# Altium PCB heart.PcbDoc (part 3 of 8)
Units mil, origin at the board's own origin, x right, y up, seen from the top; angles counter-clockwise.
Board outline 5000 x 6000 mil, 2 copper layers (Top Layer, Bottom Layer); 76 components, 43 nets, 328 pads, 50 vias.
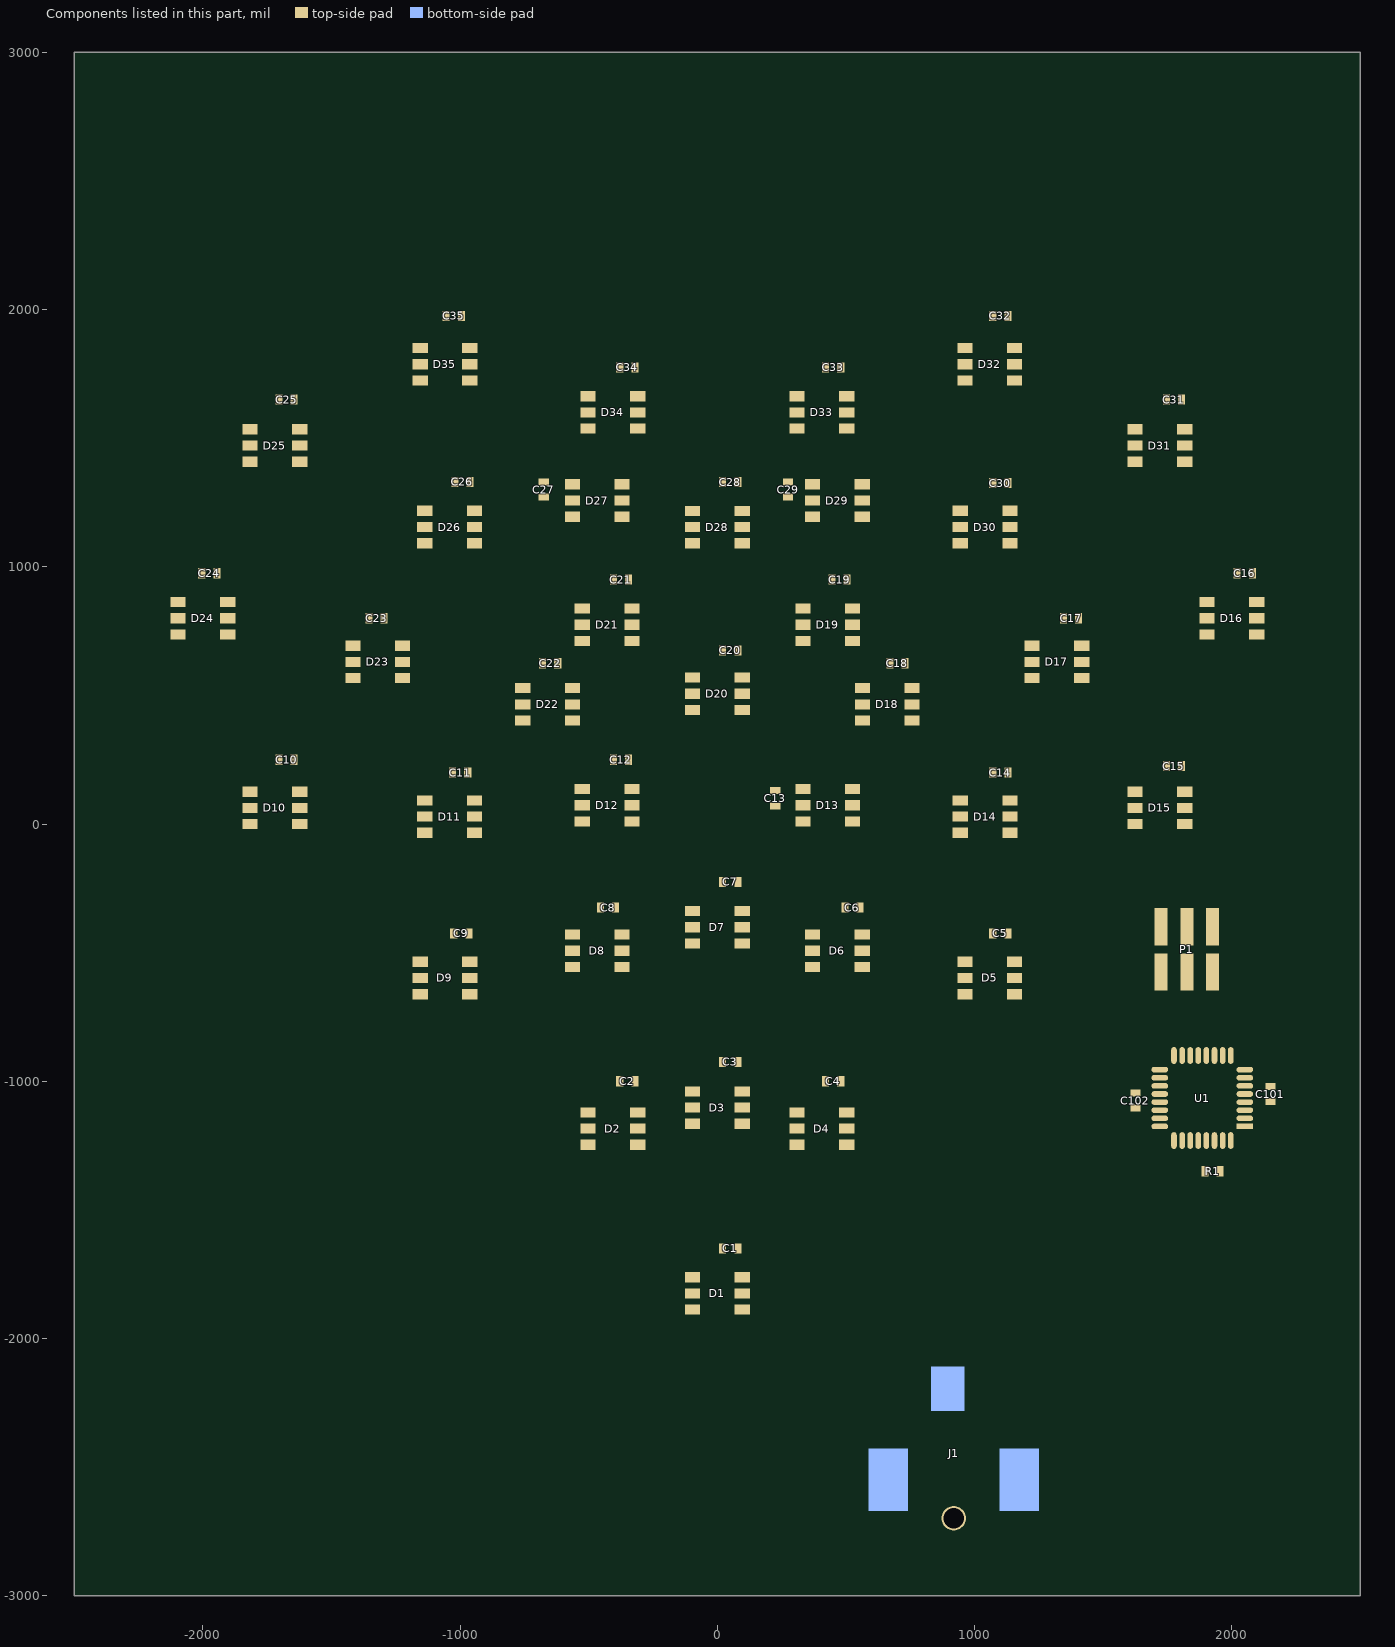
[diagram p3: the components of this part, seen from the top]

## Via types
v1: diameter 48, hole 20, Top Layer to Bottom Layer, 46 vias
v2: diameter 165, hole 150, Top Layer to Bottom Layer, 4 vias

## Nets (pads, with @x,y where several pads share a name; then routed paths per layer and width w, separated by ;. In a path a pad name is that pad's centre, name@x,y a point inside that pad or via, vN(x,y) a via of type N, cw(c..) or ccw(c..) an arc to the next point about the centre after c; other vN are vias at no path point) (continued)
copper on no net: (continued)
  Bottom Layer w2.65: -2192.83,-1878.82 -2171.59,-1878.82 ; -2192.83,-1876.16 -2176.9,-1876.16 ; -2192.83,-1873.51 -2184.86,-1873.51 ; -2192.83,-1838.99 -2076,-1838.99 ; -2192.83,-1836.34 -2073.35,-1836.34 ; -2192.83,-1833.68 -2070.69,-1833.68 ; -2192.83,-1831.03 -2068.04,-1831.03 ; -2192.83,-1796.51 -2184.86,-1796.51 ; -2192.83,-1793.86 -2176.9,-1793.86 ; -2192.83,-1791.2 -2171.59,-1791.2 ; -2192.83,-1788.55 -2168.93,-1788.55 ; -2192.83,-1785.89 -2166.28,-1785.89 ; -2192.83,-1783.24 -2163.62,-1783.24 ; -2192.83,-1780.58 -2160.97,-1780.58 ; -2192.83,-1777.93 -2158.31,-1777.93 ; -2192.83,-1775.27 -2158.31,-1775.27 ; -2192.83,-1772.62 -2155.66,-1772.62 ; -2192.83,-1769.96 -2155.66,-1769.96 ; -2192.83,-1767.31 -2153,-1767.31 ; -2192.83,-1764.65 -2153,-1764.65 ; -2192.83,-1762 -2153,-1762 ; -2192.83,-1759.34 -2153,-1759.34 ; -2192.83,-1756.69 -2153,-1756.69 ; -2192.83,-1754.03 -2153,-1754.03 ; -2192.83,-1751.38 -2153,-1751.38 ; -2192.83,-1748.72 -2153,-1748.72 ; -2192.83,-1746.07 -2153,-1746.07 ; -2192.83,-1743.41 -2153,-1743.41 ; -2192.83,-1740.76 -2153,-1740.76 ; -2192.83,-1738.1 -2155.66,-1738.1 ; -2192.83,-1735.45 -2155.66,-1735.45 ; -2192.83,-1732.79 -2155.66,-1732.79 ; -2192.83,-1730.14 -2158.31,-1730.14 ; -2192.83,-1727.48 -2158.31,-1727.48 ; -2192.83,-1724.83 -2160.97,-1724.83 ; -2192.83,-1722.17 -2160.97,-1722.17 ; -2192.83,-1719.52 -2163.62,-1719.52 ; -2192.83,-1716.86 -2166.28,-1716.86 ; -2192.83,-1714.21 -2168.93,-1714.21 ; -2192.83,-1711.55 -2168.93,-1711.55 ; -2192.83,-1708.9 -2171.59,-1708.9 ; -2192.83,-1706.24 -2171.59,-1706.24 ; -2192.83,-1703.59 -2174.24,-1703.59 ; -2192.83,-1700.93 -2171.59,-1700.93 ; -2192.83,-1698.28 -2044.14,-1698.28 ; -2192.83,-1695.62 -2046.8,-1695.62 ; -2192.83,-1692.97 -2049.45,-1692.97 ; -2192.83,-1690.31 -2049.45,-1690.31 ; -2192.83,-1687.66 -2049.45,-1687.66 ; -2192.83,-1685 -2052.11,-1685 ; -2192.83,-1682.35 -2052.11,-1682.35 ; -2192.83,-1679.69 -2054.76,-1679.69 ; -2192.83,-1677.04 -2054.76,-1677.04 ; -2192.83,-1674.38 -2054.76,-1674.38 ; -2192.83,-1671.73 -2057.42,-1671.73 ; -2192.83,-1669.07 -2057.42,-1669.07 ; -2192.83,-1666.42 -2057.42,-1666.42 ; -2192.83,-1663.76 -2060.07,-1663.76 ; -2192.83,-1661.11 -2060.07,-1661.11 ; -2192.83,-1658.45 -2060.07,-1658.45 ; -2192.83,-1655.8 -2060.07,-1655.8 ; -2192.83,-1653.14 -2060.07,-1653.14 ; -2192.83,-1650.49 -2062.73,-1650.49 ; -2192.83,-1647.83 -2062.73,-1647.83 ; -2192.83,-1645.18 -2062.73,-1645.18 ; -2192.83,-1642.52 -2062.73,-1642.52 ; -2192.83,-1639.86 -2062.73,-1639.86 ; -2192.83,-1637.21 -2062.73,-1637.21 ; -2192.83,-1634.55 -2062.73,-1634.55 ; -2192.83,-1631.9 -2062.73,-1631.9 ; -2192.83,-1629.24 -2062.73,-1629.24 ; -2192.83,-1626.59 -2062.73,-1626.59 ; -2192.83,-1623.93 -2062.73,-1623.93 ; -2192.83,-1621.28 -2062.73,-1621.28 ; -2192.83,-1618.62 -2062.73,-1618.62 ; -2192.83,-1615.97 -2062.73,-1615.97 ; -2192.83,-1613.31 -2060.07,-1613.31 ; -2192.83,-1610.66 -2060.07,-1610.66 ; -2192.83,-1608 -2060.07,-1608 ; -2192.83,-1605.35 -2060.07,-1605.35 ; -2192.83,-1602.69 -2060.07,-1602.69 ; -2192.83,-1600.04 -2057.42,-1600.04 ; -2192.83,-1597.38 -2057.42,-1597.38 ; -2192.83,-1594.73 -2057.42,-1594.73 ; -2192.83,-1592.07 -2107.87,-1592.07 ; -2192.83,-1589.42 -2113.18,-1589.42 ; -2192.83,-1586.76 -2115.83,-1586.76 ; -2192.83,-1584.11 -2118.49,-1584.11 ; -2192.83,-1581.45 -2121.14,-1581.45 ; -2192.83,-1578.8 -2121.14,-1578.8 ; -2192.83,-1576.14 -2121.14,-1576.14 ; -2192.83,-1573.49 -2121.14,-1573.49 ; -2192.83,-1570.83 -2121.14,-1570.83 ; -2192.83,-1568.18 -2118.49,-1568.18 ; -2192.83,-1565.52 -2118.49,-1565.52 ; -2192.83,-1562.87 -2115.83,-1562.87 ; -2192.83,-1560.21 -2110.52,-1560.21 ; -2192.83,-1557.56 -2083.97,-1557.56 ; -2192.83,-1554.9 -2086.62,-1554.9 ; -2192.83,-1552.25 -2086.62,-1552.25 ; -2192.83,-1549.59 -2089.28,-1549.59 ; -2192.83,-1546.94 -2094.59,-1546.94 ; -2192.83,-1544.28 -2097.24,-1544.28 ; -2192.83,-1515.08 -2134.42,-1515.08 ; -2192.83,-1512.42 -2137.07,-1512.42 ; -2192.83,-1509.77 -2137.07,-1509.77 ; -2192.83,-1507.11 -2137.07,-1507.11 ; -2192.83,-1504.46 -2137.07,-1504.46 ; -2192.83,-1501.8 -2137.07,-1501.8 ; -2192.83,-1499.15 -2137.07,-1499.15 ; -2192.83,-1496.49 -2137.07,-1496.49 ; -2192.83,-1493.84 -2137.07,-1493.84 ; -2192.83,-1491.18 -2137.07,-1491.18 ; -2192.83,-1454.01 -2184.86,-1454.01 ; -2192.83,-1451.36 -2179.55,-1451.36 ; -2192.83,-1448.7 -2168.93,-1448.7 ; -2192.83,-1446.05 -2046.8,-1446.05 ; -2192.83,-1443.39 -2046.8,-1443.39 ; -2192.83,-1440.74 -2044.14,-1440.74 ; -2192.83,-1438.08 -2044.14,-1438.08 ; -2192.83,-1435.43 -2041.49,-1435.43 ; -2192.83,-1432.77 -2038.83,-1432.77 ; -2192.83,-1430.12 -2089.28,-1430.12 ; -2192.83,-1427.46 -2099.9,-1427.46 ; -2192.83,-1424.81 -2105.21,-1424.81 ; -2192.83,-1422.15 -2110.52,-1422.15 ; -2192.83,-1419.5 -2113.18,-1419.5 ; -2192.83,-1416.84 -2115.83,-1416.84 ; -2192.83,-1414.19 -2121.14,-1414.19 ; -2192.83,-1411.53 -2121.14,-1411.53 ; -2192.83,-1408.88 -2123.8,-1408.88 ; -2192.83,-1406.22 -2126.45,-1406.22 ; -2192.83,-1403.57 -2126.45,-1403.57 ; -2192.83,-1400.91 -2129.11,-1400.91 ; -2192.83,-1398.26 -2129.11,-1398.26 ; -2192.83,-1395.6 -2129.11,-1395.6 ; -2192.83,-1392.95 -2131.76,-1392.95 ; -2192.83,-1390.29 -2131.76,-1390.29 ; -2192.83,-1387.64 -2131.76,-1387.64 ; -2192.83,-1223.03 -2017.59,-1223.03 ; -2190.17,-1517.73 -2134.42,-1517.73 ; -2190.17,-1488.53 -2137.07,-1488.53 ; -2190.17,-1485.87 -2134.42,-1485.87 ; -2190.17,-1334.54 -2160.97,-1334.54 ; -2190.17,-1225.68 -2009.63,-1225.68 ; -2187.52,-1541.63 -2102.56,-1541.63 ; -2187.52,-1523.04 -2131.76,-1523.04 ; -2187.52,-1520.39 -2131.76,-1520.39 ; -2187.52,-1483.22 -2134.42,-1483.22 ; -2187.52,-1228.34 -2006.97,-1228.34 ; -2184.86,-1533.66 -2118.49,-1533.66 ; -2184.86,-1531.01 -2123.8,-1531.01 ; -2184.86,-1528.35 -2126.45,-1528.35 ; -2184.86,-1525.7 -2129.11,-1525.7 ; -2184.86,-1480.56 -2131.76,-1480.56 ; -2184.86,-1350.47 -2168.93,-1350.47 ; -2184.86,-1331.88 -2155.66,-1331.88 ; -2184.86,-1230.99 -2006.97,-1230.99 ; -2182.21,-1841.65 -2078.66,-1841.65 ; -2182.21,-1828.37 -2065.38,-1828.37 ; -2182.21,-1538.97 -2107.87,-1538.97 ; -2182.21,-1536.32 -2113.18,-1536.32 ; -2182.21,-1353.12 -2168.93,-1353.12 ; -2182.21,-1244.27 -2014.94,-1244.27 ; -2182.21,-1241.61 -2014.94,-1241.61 ; -2182.21,-1238.96 -2012.28,-1238.96 ; -2182.21,-1236.3 -2009.63,-1236.3 ; -2182.21,-1233.65 -2009.63,-1233.65 ; -2179.55,-1865.54 -2153,-1865.54 ; -2179.55,-1804.48 -2153,-1804.48 ; -2179.55,-1477.91 -2131.76,-1477.91 ; -2179.55,-1355.78 -2168.93,-1355.78 ; -2179.55,-1329.23 -2150.35,-1329.23 ; -2176.9,-1358.43 -2168.93,-1358.43 ; -2174.24,-1844.3 -2078.66,-1844.3 ; -2174.24,-1475.25 -2129.11,-1475.25 ; -2174.24,-1366.4 -2171.59,-1366.4 ; -2174.24,-1363.74 -2168.93,-1363.74 ; -2174.24,-1361.09 -2168.93,-1361.09 ; -2174.24,-1326.57 -2145.04,-1326.57 ; -2171.59,-1868.2 -2150.35,-1868.2 ; -2171.59,-1825.72 -2062.73,-1825.72 ; -2171.59,-1801.82 -2150.35,-1801.82 ; -2168.93,-1870.85 -2147.69,-1870.85 ; -2168.93,-1799.17 -2147.69,-1799.17 ; -2168.93,-1472.6 -2126.45,-1472.6 ; -2168.93,-1323.92 -2139.73,-1323.92 ; -2166.28,-1846.96 -2078.66,-1846.96 ; -2163.62,-1873.51 -2145.04,-1873.51 ; -2163.62,-1823.06 -2057.42,-1823.06 ; -2163.62,-1796.51 -2145.04,-1796.51 ; -2163.62,-1321.26 -2134.42,-1321.26 ; -2160.97,-1876.16 -2142.38,-1876.16 ; -2160.97,-1849.61 -2081.31,-1849.61 ; -2160.97,-1820.41 -2052.11,-1820.41 ; -2160.97,-1793.86 -2142.38,-1793.86 ; -2160.97,-1469.94 -2137.07,-1469.94 ; -2158.31,-1969.09 -2076,-1969.09 ; -2158.31,-1958.47 -2155.66,-1958.47 ; -2158.31,-1878.82 -2142.38,-1878.82 ; -2158.31,-1791.2 -2139.73,-1791.2 ; -2158.31,-1700.93 -2044.14,-1700.93 ; -2158.31,-1318.61 -2129.11,-1318.61 ; -2155.66,-1955.81 -2153,-1955.81 ; -2155.66,-1953.16 -2150.35,-1953.16 ; -2155.66,-1881.47 -2139.73,-1881.47 ; -2155.66,-1852.27 -2110.52,-1852.27 ; -2155.66,-1817.75 -2110.52,-1817.75 ; -2155.66,-1788.55 -2139.73,-1788.55 ; -2155.66,-1716.86 -2150.35,-1716.86 ; -2155.66,-1714.21 -2153,-1714.21 ; -2153,-1966.43 -2076,-1966.43 ; -2153,-1950.5 -2147.69,-1950.5 ; -2153,-1886.78 -2115.83,-1886.78 ; -2153,-1884.13 -2115.83,-1884.13 ; -2153,-1785.89 -2115.83,-1785.89 ; -2153,-1783.24 -2118.49,-1783.24 ; -2153,-1722.17 -2145.04,-1722.17 ; -2153,-1719.52 -2147.69,-1719.52 ; -2153,-1703.59 -2041.49,-1703.59 ; -2153,-1315.95 -2123.8,-1315.95 ; -2150.35,-2218.66 -2134.42,-2218.66 ; -2150.35,-2216.01 -2137.07,-2216.01 ; -2150.35,-2213.35 -2137.07,-2213.35 ; -2150.35,-2210.7 -2137.07,-2210.7 ; -2150.35,-2208.04 -2137.07,-2208.04 ; -2150.35,-2205.39 -2137.07,-2205.39 ; -2150.35,-2202.73 -2137.07,-2202.73 ; -2150.35,-2200.08 -2134.42,-2200.08 ; -2150.35,-1947.85 -2145.04,-1947.85 ; -2150.35,-1945.19 -2142.38,-1945.19 ; -2150.35,-1892.09 -2123.8,-1892.09 ; -2150.35,-1889.44 -2121.14,-1889.44 ; -2150.35,-1854.92 -2110.52,-1854.92 ; -2150.35,-1815.1 -2110.52,-1815.1 ; -2150.35,-1780.58 -2121.14,-1780.58 ; -2150.35,-1777.93 -2126.45,-1777.93 ; -2150.35,-1724.83 -2142.38,-1724.83 ; -2147.69,-2226.63 -2134.42,-2226.63 ; -2147.69,-2223.97 -2134.42,-2223.97 ; -2147.69,-2221.32 -2134.42,-2221.32 ; -2147.69,-2197.42 -2134.42,-2197.42 ; -2147.69,-2194.77 -2134.42,-2194.77 ; -2147.69,-2192.11 -2134.42,-2192.11 ; -2147.69,-2189.46 -2131.76,-2189.46 ; -2147.69,-1963.78 -2078.66,-1963.78 ; -2147.69,-1942.54 -2139.73,-1942.54 ; -2147.69,-1939.88 -2139.73,-1939.88 ; -2147.69,-1937.23 -2137.07,-1937.23 ; -2147.69,-1897.4 -2131.76,-1897.4 ; -2147.69,-1894.75 -2131.76,-1894.75 ; -2147.69,-1857.58 -2113.18,-1857.58 ; -2147.69,-1812.44 -2113.18,-1812.44 ; -2147.69,-1775.27 -2131.76,-1775.27 ; -2147.69,-1772.62 -2131.76,-1772.62 ; -2147.69,-1732.79 -2137.07,-1732.79 ; -2147.69,-1730.14 -2139.73,-1730.14 ; -2147.69,-1727.48 -2139.73,-1727.48 ; -2147.69,-1706.24 -2038.83,-1706.24 ; -2147.69,-1313.3 -2118.49,-1313.3 ; -2145.04,-2234.59 -2129.11,-2234.59 ; -2145.04,-2231.94 -2131.76,-2231.94 ; -2145.04,-2229.28 -2131.76,-2229.28 ; -2145.04,-2186.8 -2131.76,-2186.8 ; -2145.04,-2184.15 -2129.11,-2184.15 ; -2145.04,-2181.49 -2129.11,-2181.49 ; -2145.04,-1961.12 -2078.66,-1961.12 ; -2145.04,-1934.57 -2137.07,-1934.57 ; -2145.04,-1931.92 -2134.42,-1931.92 ; -2145.04,-1929.26 -2134.42,-1929.26 ; -2145.04,-1908.02 -2131.76,-1908.02 ; -2145.04,-1905.37 -2131.76,-1905.37 ; -2145.04,-1902.71 -2131.76,-1902.71 ; -2145.04,-1900.06 -2131.76,-1900.06 ; -2145.04,-1860.23 -2113.18,-1860.23 ; -2145.04,-1809.79 -2113.18,-1809.79 ; -2145.04,-1769.96 -2131.76,-1769.96 ; -2145.04,-1767.31 -2131.76,-1767.31 ; -2145.04,-1764.65 -2131.76,-1764.65 ; -2145.04,-1762 -2131.76,-1762 ; -2145.04,-1740.76 -2134.42,-1740.76 ; -2145.04,-1738.1 -2134.42,-1738.1 ; -2145.04,-1735.45 -2137.07,-1735.45 ; -2145.04,-1708.9 -2038.83,-1708.9 ; -2142.38,-2239.9 -2126.45,-2239.9 ; -2142.38,-2237.25 -2126.45,-2237.25 ; -2142.38,-2178.84 -2126.45,-2178.84 ; -2142.38,-2176.18 -2126.45,-2176.18 ; -2142.38,-1958.47 -2078.66,-1958.47 ; -2142.38,-1926.61 -2134.42,-1926.61 ; -2142.38,-1923.95 -2131.76,-1923.95 ; -2142.38,-1921.3 -2131.76,-1921.3 ; -2142.38,-1918.64 -2131.76,-1918.64 ; -2142.38,-1915.99 -2131.76,-1915.99 ; -2142.38,-1913.33 -2131.76,-1913.33 ; -2142.38,-1910.68 -2131.76,-1910.68 ; -2142.38,-1862.89 -2113.18,-1862.89 ; -2142.38,-1807.13 -2113.18,-1807.13 ; -2142.38,-1759.34 -2131.76,-1759.34 ; -2142.38,-1756.69 -2131.76,-1756.69 ; -2142.38,-1754.03 -2131.76,-1754.03 ; -2142.38,-1751.38 -2131.76,-1751.38 ; -2142.38,-1748.72 -2131.76,-1748.72 ; -2142.38,-1746.07 -2131.76,-1746.07 ; -2142.38,-1743.41 -2134.42,-1743.41 ; -2142.38,-1711.55 -2036.18,-1711.55 ; -2142.38,-1310.64 -2110.52,-1310.64 ; -2139.73,-2245.21 -2121.14,-2245.21 ; -2139.73,-2242.56 -2123.8,-2242.56 ; -2139.73,-2173.53 -2123.8,-2173.53 ; -2139.73,-1955.81 -2078.66,-1955.81 ; -2139.73,-1865.54 -2113.18,-1865.54 ; -2139.73,-1804.48 -2115.83,-1804.48 ; -2139.73,-1714.21 -2033.52,-1714.21 ; -2139.73,-1300.02 -2057.42,-1300.02 ; -2139.73,-1297.37 -2121.14,-1297.37 ; -2139.73,-1294.71 -2123.8,-1294.71 ; -2139.73,-1292.06 -2126.45,-1292.06 ; -2139.73,-1289.4 -2129.11,-1289.4 ; -2139.73,-1286.75 -2131.76,-1286.75 ; -2139.73,-1284.09 -2131.76,-1284.09 ; -2139.73,-1281.44 -2134.42,-1281.44 ; -2139.73,-1278.78 -2134.42,-1278.78 ; -2137.07,-2277.07 -2131.76,-2277.07 ; -2137.07,-2274.42 -2129.11,-2274.42 ; -2137.07,-2247.87 -2118.49,-2247.87 ; -2137.07,-2170.87 -2121.14,-2170.87 ; -2137.07,-2168.22 -2118.49,-2168.22 ; -2137.07,-1953.16 -2078.66,-1953.16 ; -2137.07,-1868.2 -2115.83,-1868.2 ; -2137.07,-1801.82 -2115.83,-1801.82 ; -2137.07,-1716.86 -2030.87,-1716.86 ; -2137.07,-1307.99 -2099.9,-1307.99 ; -2137.07,-1305.33 -2046.8,-1305.33 ; -2137.07,-1302.68 -2052.11,-1302.68 ; -2137.07,-1276.13 -2134.42,-1276.13 ; -2137.07,-1273.47 -2134.42,-1273.47 ; -2134.42,-2287.69 -1698.99,-2287.69 ; -2134.42,-2271.76 -2126.45,-2271.76 ; -2134.42,-2269.11 -2123.8,-2269.11 ; -2134.42,-2266.45 -2121.14,-2266.45 ; -2134.42,-2263.8 -2060.07,-2263.8 ; -2134.42,-2261.14 -2089.28,-2261.14 ; -2134.42,-2258.49 -2099.9,-2258.49 ; -2134.42,-2250.52 -2115.83,-2250.52 ; -2134.42,-2165.56 -2115.83,-2165.56 ; -2134.42,-1950.5 -2078.66,-1950.5 ; -2134.42,-1881.47 -2126.45,-1881.47 ; -2134.42,-1788.55 -2126.45,-1788.55 ; -2134.42,-1719.52 -2028.21,-1719.52 ; -2134.42,-1448.7 -2046.8,-1448.7 ; -2131.76,-2253.18 -2110.52,-2253.18 ; -2131.76,-2162.91 -2113.18,-2162.91 ; -2131.76,-1947.85 -2078.66,-1947.85 ; -2131.76,-1945.19 -2076,-1945.19 ; -2131.76,-1870.85 -2115.83,-1870.85 ; -2131.76,-1724.83 -2022.9,-1724.83 ; -2131.76,-1722.17 -2025.56,-1722.17 ; -2129.11,-2255.83 -2105.21,-2255.83 ; -2129.11,-2160.25 -2107.87,-2160.25 ; -2129.11,-1942.54 -2076,-1942.54 ; -2129.11,-1939.88 -2076,-1939.88 ; -2129.11,-1799.17 -2118.49,-1799.17 ; -2129.11,-1730.14 -2014.94,-1730.14 ; -2129.11,-1727.48 -2020.25,-1727.48 ; -2126.45,-2285.04 -1701.65,-2285.04 ; -2126.45,-2157.6 -2102.56,-2157.6 ; -2126.45,-2125.73 -2038.83,-2125.73 ; -2126.45,-1937.23 -2073.35,-1937.23 ; -2126.45,-1934.57 -2073.35,-1934.57 ; -2126.45,-1931.92 -2070.69,-1931.92 ; -2126.45,-1738.1 -2001.66,-1738.1 ; -2126.45,-1735.45 -2006.97,-1735.45 ; -2126.45,-1732.79 -2012.28,-1732.79 ; -2126.45,-1451.36 -2046.8,-1451.36 ; -2123.8,-2282.38 -1706.96,-2282.38 ; -2123.8,-2154.94 -2097.24,-2154.94 ; -2123.8,-2123.08 -2038.83,-2123.08 ; -2123.8,-1929.26 -2068.04,-1929.26 ; -2123.8,-1926.61 -2068.04,-1926.61 ; -2123.8,-1923.95 -2065.38,-1923.95 ; -2123.8,-1921.3 -2062.73,-1921.3 ; -2123.8,-1918.64 -2057.42,-1918.64 ; -2123.8,-1915.99 -2054.76,-1915.99 ; -2123.8,-1908.02 -2041.49,-1908.02 ; -2123.8,-1905.37 -2036.18,-1905.37 ; -2123.8,-1902.71 -2030.87,-1902.71 ; -2123.8,-1767.31 -1972.46,-1767.31 ; -2123.8,-1764.65 -1969.8,-1764.65 ; -2123.8,-1762 -1967.15,-1762 ; -2123.8,-1754.03 -1882.19,-1754.03 ; -2123.8,-1751.38 -1879.53,-1751.38 ; -2123.8,-1748.72 -1871.57,-1748.72 ; -2123.8,-1746.07 -1977.77,-1746.07 ; -2123.8,-1743.41 -1988.39,-1743.41 ; -2123.8,-1740.76 -1996.35,-1740.76 ; -2123.8,-1384.98 -2110.52,-1384.98 ; -2123.8,-1281.44 -2097.24,-1281.44 ; -2123.8,-1278.78 -2091.93,-1278.78 ; -2123.8,-1276.13 -2086.62,-1276.13 ; -2123.8,-1273.47 -2078.66,-1273.47 ; -2121.14,-2279.73 -2099.9,-2279.73 ; -2121.14,-2231.94 -1983.08,-2231.94 ; -2121.14,-2120.42 -2041.49,-2120.42 ; -2121.14,-1913.33 -2052.11,-1913.33 ; -2121.14,-1910.68 -2046.8,-1910.68 ; -2121.14,-1900.06 -2060.07,-1900.06 ; -2121.14,-1769.96 -1975.11,-1769.96 ; -2121.14,-1759.34 -1884.84,-1759.34 ; -2121.14,-1756.69 -1884.84,-1756.69 ; -2121.14,-1395.6 -2107.87,-1395.6 ; -2121.14,-1392.95 -2107.87,-1392.95 ; -2121.14,-1390.29 -2110.52,-1390.29 ; -2121.14,-1387.64 -2110.52,-1387.64 ; -2121.14,-1382.33 -2110.52,-1382.33 ; -2121.14,-1379.67 -2110.52,-1379.67 ; -2121.14,-1377.02 -2110.52,-1377.02 ; -2121.14,-1374.36 -2107.87,-1374.36 ; -2121.14,-1270.82 -2070.69,-1270.82 ; -2118.49,-2277.07 -2110.52,-2277.07 ; -2118.49,-2234.59 -1884.84,-2234.59 ; -2118.49,-2152.28 -2073.35,-2152.28 ; -2118.49,-1881.47 -2113.18,-1881.47 ; -2118.49,-1788.55 -2113.18,-1788.55 ; -2118.49,-1454.01 -2049.45,-1454.01 ; -2118.49,-1400.91 -2102.56,-1400.91 ; -2118.49,-1398.26 -2105.21,-1398.26 ; -2118.49,-1371.71 -2107.87,-1371.71 ; -2118.49,-1369.05 -2105.21,-1369.05 ; -2118.49,-1284.09 -2105.21,-1284.09 ; -2115.83,-2237.25 -1879.53,-2237.25 ; -2115.83,-2149.63 -2025.56,-2149.63 ; -2115.83,-2117.77 -2044.14,-2117.77 ; -2115.83,-1897.4 -2070.69,-1897.4 ; -2115.83,-1772.62 -1975.11,-1772.62 ; -2115.83,-1507.11 -2078.66,-1507.11 ; -2115.83,-1504.46 -2083.97,-1504.46 ; -2115.83,-1501.8 -2086.62,-1501.8 ; -2115.83,-1499.15 -2089.28,-1499.15 ; -2115.83,-1406.22 -2091.93,-1406.22 ; -2115.83,-1403.57 -2099.9,-1403.57 ; -2115.83,-1366.4 -2102.56,-1366.4 ; -2115.83,-1268.16 -2065.38,-1268.16 ; -2113.18,-2266.45 -2065.38,-2266.45 ; -2113.18,-2239.9 -1876.88,-2239.9 ; -2113.18,-2146.97 -2028.21,-2146.97 ; -2113.18,-2115.11 -2046.8,-2115.11 ; -2113.18,-1894.75 -2073.35,-1894.75 ; -2113.18,-1775.27 -1975.11,-1775.27 ; -2113.18,-1512.42 -2070.69,-1512.42 ; -2113.18,-1509.77 -2076,-1509.77 ; -2113.18,-1496.49 -2091.93,-1496.49 ; -2113.18,-1493.84 -2097.24,-1493.84 ; -2113.18,-1456.67 -2049.45,-1456.67 ; -2113.18,-1408.88 -2041.49,-1408.88 ; -2113.18,-1363.74 -2097.24,-1363.74 ; -2113.18,-1297.37 -2062.73,-1297.37 ; -2113.18,-1265.51 -2057.42,-1265.51 ; -2113.18,-1262.85 -2049.45,-1262.85 ; -2113.18,-1260.2 -2044.14,-1260.2 ; -2113.18,-1257.54 -2036.18,-1257.54 ; -2110.52,-2242.56 -1874.22,-2242.56 ; -2110.52,-1892.09 -2078.66,-1892.09 ; -2110.52,-1777.93 -1977.77,-1777.93 ; -2110.52,-1515.08 -2065.38,-1515.08 ; -2110.52,-1491.18 -2099.9,-1491.18 ; -2110.52,-1361.09 -2076,-1361.09 ; -2107.87,-2245.21 -2052.11,-2245.21 ; -2107.87,-2112.46 -2049.45,-2112.46 ; -2107.87,-1889.44 -2078.66,-1889.44 ; -2107.87,-1857.58 -2083.97,-1857.58 ; -2107.87,-1854.92 -2083.97,-1854.92 ; -2107.87,-1852.27 -2081.31,-1852.27 ; -2107.87,-1817.75 -2044.14,-1817.75 ; -2107.87,-1815.1 -1956.53,-1815.1 ; -2107.87,-1812.44 -1959.18,-1812.44 ; -2107.87,-1780.58 -1977.77,-1780.58 ; -2107.87,-1517.73 -2057.42,-1517.73 ; -2107.87,-1459.32 -2049.45,-1459.32 ; -2107.87,-1411.53 -2046.8,-1411.53 ; -2105.21,-2269.11 -2073.35,-2269.11 ; -2105.21,-2144.32 -2028.21,-2144.32 ; -2105.21,-2109.8 -2054.76,-2109.8 ; -2105.21,-1886.78 -2081.31,-1886.78 ; -2105.21,-1884.13 -2083.97,-1884.13 ; -2105.21,-1865.54 -2083.97,-1865.54 ; -2105.21,-1862.89 -2083.97,-1862.89 ; -2105.21,-1860.23 -2083.97,-1860.23 ; -2105.21,-1809.79 -1961.84,-1809.79 ; -2105.21,-1807.13 -1964.49,-1807.13 ; -2105.21,-1804.48 -1964.49,-1804.48 ; -2105.21,-1785.89 -1975.11,-1785.89 ; -2105.21,-1783.24 -1975.11,-1783.24 ; -2105.21,-1520.39 -2038.83,-1520.39 ; -2105.21,-1461.98 -2049.45,-1461.98 ; -2105.21,-1414.19 -2052.11,-1414.19 ; -2105.21,-1358.43 -2081.31,-1358.43 ; -2102.56,-2247.87 -2057.42,-2247.87 ; -2102.56,-1881.47 -2083.97,-1881.47 ; -2102.56,-1878.82 -2083.97,-1878.82 ; -2102.56,-1876.16 -2083.97,-1876.16 ; -2102.56,-1873.51 -2086.62,-1873.51 ; -2102.56,-1870.85 -2086.62,-1870.85 ; -2102.56,-1868.2 -2083.97,-1868.2 ; -2102.56,-1801.82 -1967.15,-1801.82 ; -2102.56,-1799.17 -1969.8,-1799.17 ; -2102.56,-1796.51 -1969.8,-1796.51 ; -2102.56,-1793.86 -1972.46,-1793.86 ; -2102.56,-1791.2 -1972.46,-1791.2 ; -2102.56,-1788.55 -1975.11,-1788.55 ; -2102.56,-1464.63 -2046.8,-1464.63 ; -2102.56,-1416.84 -2057.42,-1416.84 ; -2102.56,-1294.71 -2068.04,-1294.71 ; -2099.9,-2141.66 -2028.21,-2141.66 ; -2099.9,-2107.15 -2057.42,-2107.15 ; -2099.9,-1523.04 -2009.63,-1523.04 ; -2099.9,-1390.29 -2054.76,-1390.29 ; -2099.9,-1387.64 -2052.11,-1387.64 ; -2097.24,-2104.49 -1988.39,-2104.49 ; -2097.24,-1592.07 -2057.42,-1592.07 ; -2097.24,-1560.21 -2083.97,-1560.21 ; -2097.24,-1525.7 -2012.28,-1525.7 ; -2097.24,-1467.29 -2046.8,-1467.29 ; -2097.24,-1392.95 -2057.42,-1392.95 ; -2097.24,-1355.78 -2089.28,-1355.78 ; -2097.24,-1292.06 -2065.38,-1292.06 ; -2094.59,-2250.52 -2065.38,-2250.52 ; -2094.59,-1562.87 -2083.97,-1562.87 ; -2094.59,-1469.94 -2046.8,-1469.94 ; -2094.59,-1419.5 -2065.38,-1419.5 ; -2094.59,-1395.6 -2062.73,-1395.6 ; -2091.93,-2101.84 -1988.39,-2101.84 ; -2091.93,-1565.52 -2083.97,-1565.52 ; -2091.93,-1528.35 -2014.94,-1528.35 ; -2091.93,-1472.6 -2046.8,-1472.6 ; -2091.93,-1289.4 -2057.42,-1289.4 ; -2089.28,-2154.94 -2073.35,-2154.94 ; -2089.28,-2139.01 -2057.42,-2139.01 ; -2089.28,-1589.42 -2054.76,-1589.42 ; -2089.28,-1570.83 -2083.97,-1570.83 ; -2089.28,-1568.18 -2083.97,-1568.18 ; -2089.28,-1475.25 -2044.14,-1475.25 ; -2086.62,-2160.25 -2073.35,-2160.25 ; -2086.62,-2157.6 -2073.35,-2157.6 ; -2086.62,-2099.18 -1988.39,-2099.18 ; -2086.62,-1531.01 -2020.25,-1531.01 ; -2086.62,-1477.91 -2041.49,-1477.91 ; -2086.62,-1398.26 -2070.69,-1398.26 ; -2086.62,-1286.75 -2049.45,-1286.75 ; -2083.97,-2165.56 -2073.35,-2165.56 ; -2083.97,-2162.91 -2073.35,-2162.91 ; -2083.97,-1586.76 -2054.76,-1586.76 ; -2083.97,-1533.66 -2020.25,-1533.66 ; -2083.97,-1480.56 -2041.49,-1480.56 ; -2081.31,-2178.84 -2078.66,-2178.84 ; -2081.31,-2176.18 -2076,-2176.18 ; -2081.31,-2173.53 -2076,-2173.53 ; -2081.31,-2170.87 -2073.35,-2170.87 ; -2081.31,-2168.22 -2073.35,-2168.22 ; -2081.31,-2096.53 -1988.39,-2096.53 ; -2081.31,-1584.11 -2054.76,-1584.11 ; -2081.31,-1536.32 -2022.9,-1536.32 ; -2081.31,-1483.22 -2038.83,-1483.22 ; -2081.31,-1284.09 -2044.14,-1284.09 ; -2078.66,-2279.73 -1712.27,-2279.73 ; -2078.66,-1581.45 -2052.11,-1581.45 ; -2078.66,-1538.97 -2025.56,-1538.97 ; -2078.66,-1485.87 -2036.18,-1485.87 ; -2076,-2093.87 -1985.73,-2093.87 ; -2076,-1578.8 -2052.11,-1578.8 ; -2076,-1541.63 -2028.21,-1541.63 ; -2076,-1488.53 -2033.52,-1488.53 ; -2073.35,-1576.14 -2049.45,-1576.14 ; -2073.35,-1573.49 -2049.45,-1573.49 ; -2073.35,-1549.59 -2036.18,-1549.59 ; -2073.35,-1546.94 -2033.52,-1546.94 ; -2073.35,-1544.28 -2030.87,-1544.28 ; -2073.35,-1491.18 -2028.21,-1491.18 ; -2073.35,-1307.99 -2044.14,-1307.99 ; -2073.35,-1281.44 -2036.18,-1281.44 ; -2070.69,-2261.14 -2057.42,-2261.14 ; -2070.69,-1570.83 -2046.8,-1570.83 ; -2070.69,-1568.18 -2046.8,-1568.18 ; -2070.69,-1565.52 -2044.14,-1565.52 ; -2070.69,-1562.87 -2044.14,-1562.87 ; -2070.69,-1560.21 -2041.49,-1560.21 ; -2070.69,-1557.56 -2041.49,-1557.56 ; -2070.69,-1554.9 -2038.83,-1554.9 ; -2070.69,-1552.25 -2036.18,-1552.25 ; -2070.69,-1493.84 -2025.56,-1493.84 ; -2070.69,-1430.12 -2036.18,-1430.12 ; -2068.04,-2277.07 -1874.22,-2277.07 ; -2068.04,-2091.22 -1985.73,-2091.22 ; -2065.38,-1496.49 -2017.59,-1496.49 ; -2065.38,-1406.22 -2038.83,-1406.22 ; -2065.38,-1310.64 -2041.49,-1310.64 ; -2065.38,-1278.78 -2028.21,-1278.78 ; -2062.73,-2274.42 -1879.53,-2274.42 ; -2062.73,-1499.15 -2006.97,-1499.15 ; -2060.07,-2258.49 -2054.76,-2258.49 ; -2060.07,-2088.56 -1985.73,-2088.56 ; -2060.07,-1403.57 -2036.18,-1403.57 ; -2060.07,-1313.3 -2038.83,-1313.3 ; -2060.07,-1276.13 -2020.25,-1276.13 ; -2057.42,-2271.76 -1879.53,-2271.76 ; -2057.42,-2152.28 -2020.25,-2152.28 ; -2057.42,-1841.65 -2017.59,-1841.65 ; -2057.42,-1427.46 -2033.52,-1427.46 ; -2054.76,-1501.8 -2014.94,-1501.8 ; -2054.76,-1400.91 -2033.52,-1400.91 ; -2054.76,-1315.95 -2036.18,-1315.95 ; -2052.11,-2269.11 -1879.53,-2269.11 ; -2052.11,-2085.91 -1983.08,-2085.91 ; -2052.11,-1958.47 -2012.28,-1958.47 ; -2052.11,-1955.81 -2012.28,-1955.81 ; -2052.11,-1953.16 -2009.63,-1953.16 ; -2052.11,-1950.5 -2009.63,-1950.5 ; -2052.11,-1947.85 -2006.97,-1947.85 ; -2052.11,-1900.06 -2025.56,-1900.06 ; -2052.11,-1844.3 -2014.94,-1844.3 ; -2052.11,-1838.99 -2020.25,-1838.99 ; -2052.11,-1424.81 -2030.87,-1424.81 ; -2052.11,-1318.61 -2033.52,-1318.61 ; -2052.11,-1273.47 -2012.28,-1273.47 ; -2049.45,-2266.45 -1874.22,-2266.45 ; -2049.45,-1961.12 -2012.28,-1961.12 ; -2049.45,-1945.19 -2006.97,-1945.19 ; -2049.45,-1504.46 -2020.25,-1504.46 ; -2049.45,-1398.26 -2030.87,-1398.26 ; -2049.45,-1321.26 -2030.87,-1321.26 ; -2046.8,-2263.8 -1866.26,-2263.8 ; -2046.8,-2154.94 -2017.59,-2154.94 ; -2046.8,-2083.25 -1983.08,-2083.25 ; -2046.8,-1963.78 -2014.94,-1963.78 ; -2046.8,-1942.54 -2006.97,-1942.54 ; -2046.8,-1836.34 -2028.21,-1836.34 ; -2046.8,-1422.15 -2025.56,-1422.15 ; -2046.8,-1395.6 -2004.32,-1395.6 ; -2046.8,-1323.92 -2028.21,-1323.92 ; -2044.14,-2261.14 -1863.6,-2261.14 ; -2044.14,-1939.88 -2004.32,-1939.88 ; -2044.14,-1897.4 -2020.25,-1897.4 ; -2044.14,-1846.96 -2012.28,-1846.96 ; -2044.14,-1392.95 -1999.01,-1392.95 ; -2044.14,-1326.57 -2028.21,-1326.57 ; -2044.14,-1270.82 -2004.32,-1270.82 ; -2041.49,-2258.49 -1863.6,-2258.49 ; -2041.49,-2157.6 -2012.28,-2157.6 ; -2041.49,-2139.01 -2025.56,-2139.01 ; -2041.49,-1966.43 -2014.94,-1966.43 ; -2041.49,-1937.23 -2004.32,-1937.23 ; -2041.49,-1655.8 -2012.28,-1655.8 ; -2041.49,-1653.14 -2012.28,-1653.14 ; -2041.49,-1650.49 -2012.28,-1650.49 ; -2041.49,-1647.83 -2012.28,-1647.83 ; -2041.49,-1645.18 -2012.28,-1645.18 ; -2041.49,-1642.52 -2012.28,-1642.52 ; -2041.49,-1639.86 -2014.94,-1639.86 ; -2041.49,-1637.21 -2014.94,-1637.21 ; -2041.49,-1634.55 -2014.94,-1634.55 ; -2041.49,-1631.9 -2014.94,-1631.9 ; -2041.49,-1629.24 -2014.94,-1629.24 ; -2041.49,-1626.59 -2012.28,-1626.59 ; -2041.49,-1623.93 -2012.28,-1623.93 ; -2041.49,-1621.28 -2012.28,-1621.28 ; -2041.49,-1618.62 -2012.28,-1618.62 ; -2041.49,-1615.97 -2012.28,-1615.97 ; -2041.49,-1419.5 -2017.59,-1419.5 ; -2041.49,-1390.29 -1999.01,-1390.29 ; -2041.49,-1387.64 -1996.35,-1387.64 ; -2041.49,-1329.23 -2025.56,-1329.23 ; -2038.83,-2255.83 -1863.6,-2255.83 ; -2038.83,-2253.18 -1866.26,-2253.18 ; -2038.83,-2250.52 -1868.91,-2250.52 ; -2038.83,-2247.87 -1868.91,-2247.87 ; -2038.83,-2245.21 -1871.57,-2245.21 ; -2038.83,-2136.35 -2025.56,-2136.35 ; -2038.83,-2107.15 -1988.39,-2107.15 ; -2038.83,-2080.6 -1980.42,-2080.6 ; -2038.83,-1934.57 -2004.32,-1934.57 ; -2038.83,-1894.75 -2017.59,-1894.75 ; -2038.83,-1849.61 -2009.63,-1849.61 ; -2038.83,-1666.42 -2006.97,-1666.42 ; -2038.83,-1663.76 -2009.63,-1663.76 ; -2038.83,-1661.11 -2009.63,-1661.11 ; -2038.83,-1658.45 -2009.63,-1658.45 ; -2038.83,-1613.31 -2009.63,-1613.31 ; -2038.83,-1610.66 -2009.63,-1610.66 ; -2038.83,-1608 -2009.63,-1608 ; -2038.83,-1605.35 -2006.97,-1605.35 ; -2038.83,-1416.84 -1940.6,-1416.84 ; -2038.83,-1384.98 -2014.94,-1384.98 ; -2038.83,-1334.54 -2022.9,-1334.54 ; -2038.83,-1331.88 -2025.56,-1331.88 ; -2038.83,-1268.16 -1996.35,-1268.16 ; -2036.18,-1969.09 -2017.59,-1969.09 ; -2036.18,-1892.09 -2014.94,-1892.09 ; -2036.18,-1852.27 -2006.97,-1852.27 ; -2036.18,-1674.38 -2001.66,-1674.38 ; -2036.18,-1671.73 -2004.32,-1671.73 ; -2036.18,-1669.07 -2006.97,-1669.07 ; -2036.18,-1602.69 -2004.32,-1602.69 ; -2036.18,-1600.04 -2004.32,-1600.04 ; -2036.18,-1597.38 -2001.66,-1597.38 ; -2036.18,-1382.33 -2017.59,-1382.33 ; -2036.18,-1379.67 -2020.25,-1379.67 ; -2036.18,-1377.02 -2020.25,-1377.02 ; -2036.18,-1342.5 -2020.25,-1342.5 ; -2036.18,-1339.85 -2022.9,-1339.85 ; -2036.18,-1337.19 -2022.9,-1337.19 ; -2033.52,-2160.25 -2006.97,-2160.25 ; -2033.52,-2133.7 -2025.56,-2133.7 ; -2033.52,-2077.94 -1977.77,-2077.94 ; -2033.52,-1931.92 -2001.66,-1931.92 ; -2033.52,-1889.44 -2012.28,-1889.44 ; -2033.52,-1886.78 -2009.63,-1886.78 ; -2033.52,-1857.58 -2004.32,-1857.58 ; -2033.52,-1854.92 -2006.97,-1854.92 ; -2033.52,-1679.69 -1999.01,-1679.69 ; -2033.52,-1677.04 -2001.66,-1677.04 ; -2033.52,-1594.73 -1999.01,-1594.73 ; -2033.52,-1592.07 -1999.01,-1592.07 ; -2033.52,-1589.42 -1996.35,-1589.42 ; -2033.52,-1520.39 -2006.97,-1520.39 ; -2033.52,-1414.19 -1943.25,-1414.19 ; -2033.52,-1374.36 -2020.25,-1374.36 ; -2033.52,-1371.71 -2020.25,-1371.71 ; -2033.52,-1369.05 -2020.25,-1369.05 ; -2033.52,-1366.4 -2020.25,-1366.4 ; -2033.52,-1363.74 -2017.59,-1363.74 ; -2033.52,-1353.12 -2020.25,-1353.12 ; -2033.52,-1350.47 -2020.25,-1350.47 ; -2033.52,-1347.81 -2020.25,-1347.81 ; -2033.52,-1345.16 -2020.25,-1345.16 ; -2030.87,-2131.04 -2025.56,-2131.04 ; -2030.87,-2128.39 -2025.56,-2128.39 ; -2030.87,-2125.73 -2025.56,-2125.73 ; -2030.87,-2123.08 -2028.21,-2123.08 ; -2030.87,-2109.8 -1988.39,-2109.8 ; -2030.87,-1971.74 -2017.59,-1971.74 ; -2030.87,-1884.13 -2006.97,-1884.13 ; -2030.87,-1881.47 -2006.97,-1881.47 ; -2030.87,-1878.82 -2004.32,-1878.82 ; -2030.87,-1865.54 -2004.32,-1865.54 ; -2030.87,-1862.89 -2004.32,-1862.89 ; -2030.87,-1860.23 -2004.32,-1860.23 ; -2030.87,-1685 -1991.04,-1685 ; -2030.87,-1682.35 -1996.35,-1682.35 ; -2030.87,-1586.76 -1993.7,-1586.76 ; -2030.87,-1584.11 -1988.39,-1584.11 ; -2030.87,-1411.53 -1943.25,-1411.53 ; -2030.87,-1361.09 -2017.59,-1361.09 ; -2030.87,-1358.43 -2017.59,-1358.43 ; -2030.87,-1355.78 -2017.59,-1355.78 ; -2030.87,-1265.51 -1988.39,-1265.51 ; -2028.21,-2162.91 -2001.66,-2162.91 ; -2028.21,-2075.29 -1975.11,-2075.29 ; -2028.21,-1929.26 -2001.66,-1929.26 ; -2028.21,-1876.16 -2004.32,-1876.16 ; -2028.21,-1873.51 -2004.32,-1873.51 ; -2028.21,-1870.85 -2004.32,-1870.85 ; -2028.21,-1868.2 -2004.32,-1868.2 ; -2028.21,-1690.31 -1980.42,-1690.31 ; -2028.21,-1687.66 -1985.73,-1687.66 ; -2028.21,-1581.45 -1985.73,-1581.45 ; -2028.21,-1578.8 -1980.42,-1578.8 ; -2028.21,-1408.88 -1943.25,-1408.88 ; -2025.56,-2165.56 -1996.35,-2165.56 ; -2025.56,-2112.46 -1985.73,-2112.46 ; -2025.56,-1817.75 -1953.87,-1817.75 ; -2025.56,-1692.97 -1972.46,-1692.97 ; -2025.56,-1576.14 -1975.11,-1576.14 ; -2025.56,-1573.49 -1969.8,-1573.49 ; -2022.9,-2115.11 -1985.73,-2115.11 ; -2022.9,-2072.63 -1972.46,-2072.63 ; -2022.9,-1974.4 -2017.59,-1974.4 ; -2022.9,-1926.61 -1999.01,-1926.61 ; -2022.9,-1698.28 -1895.46,-1698.28 ; -2022.9,-1695.62 -1964.49,-1695.62 ; -2022.9,-1570.83 -1959.18,-1570.83 ; -2022.9,-1262.85 -1977.77,-1262.85 ; -2020.25,-2168.22 -1991.04,-2168.22 ; -2020.25,-2117.77 -1985.73,-2117.77 ; -2020.25,-1923.95 -1999.01,-1923.95 ; -2020.25,-1700.93 -1898.12,-1700.93 ; -2020.25,-1568.18 -1850.33,-1568.18 ; -2020.25,-1565.52 -1852.98,-1565.52 ; -2020.25,-1517.73 -2004.32,-1517.73 ; -2020.25,-1398.26 -2012.28,-1398.26 ; -2020.25,-1260.2 -1967.15,-1260.2 ; -2017.59,-2125.73 -1980.42,-2125.73 ; -2017.59,-2123.08 -1983.08,-2123.08 ; -2017.59,-2120.42 -1985.73,-2120.42 ; -2017.59,-1703.59 -1900.77,-1703.59 ; -2017.59,-1562.87 -1852.98,-1562.87 ; -2017.59,-1257.54 -1914.05,-1257.54 ; -2014.94,-2170.87 -1985.73,-2170.87 ; -2014.94,-1921.3 -1996.35,-1921.3 ; -2014.94,-1820.41 -1951.22,-1820.41 ; -2014.94,-1706.24 -1903.43,-1706.24 ; -2014.94,-1560.21 -1855.64,-1560.21 ; -2014.94,-1254.89 -2004.32,-1254.89 ; -2012.28,-2069.98 -1969.8,-2069.98 ; -2012.28,-1708.9 -1906.08,-1708.9 ; -2012.28,-1557.56 -1858.29,-1557.56 ; -2012.28,-1515.08 -1999.01,-1515.08 ; -2012.28,-1284.09 -1922.01,-1284.09 ; -2012.28,-1252.23 -2001.66,-1252.23 ; -2009.63,-2173.53 -1980.42,-2173.53 ; -2009.63,-1918.64 -1996.35,-1918.64 ; -2009.63,-1823.06 -1948.56,-1823.06 ; -2009.63,-1711.55 -1908.74,-1711.55 ; -2009.63,-1554.9 -1858.29,-1554.9 ; -2009.63,-1249.58 -2001.66,-1249.58 ; -2009.63,-1212.41 -1847.67,-1212.41 ; -2006.97,-1915.99 -1993.7,-1915.99 ; -2006.97,-1714.21 -1911.39,-1714.21 ; -2006.97,-1552.25 -1860.95,-1552.25 ; -2006.97,-1512.42 -1993.7,-1512.42 ; -2006.97,-1281.44 -1922.01,-1281.44 ; -2006.97,-1246.92 -2001.66,-1246.92 ; -2004.32,-2176.18 -1975.11,-2176.18 ; -2004.32,-1825.72 -1948.56,-1825.72 ; -2004.32,-1549.59 -1860.95,-1549.59 ; -2004.32,-1406.22 -1940.6,-1406.22 ; -2004.32,-1244.27 -1999.01,-1244.27 ; -2001.66,-1990.33 -1903.43,-1990.33 ; -2001.66,-1987.67 -1903.43,-1987.67 ; -2001.66,-1985.02 -1906.08,-1985.02 ; -2001.66,-1913.33 -1991.04,-1913.33 ; -2001.66,-1828.37 -1945.91,-1828.37 ; -2001.66,-1716.86 -1916.7,-1716.86 ; -2001.66,-1546.94 -1863.6,-1546.94 ; -2001.66,-1509.77 -1991.04,-1509.77 ; -2001.66,-1384.98 -1996.35,-1384.98 ; -2001.66,-1278.78 -1924.67,-1278.78 ; -2001.66,-1254.89 -1919.36,-1254.89 ; -2001.66,-1241.61 -1999.01,-1241.61 ; -2001.66,-1238.96 -1999.01,-1238.96 ; -1999.01,-2178.84 -1967.15,-2178.84 ; -1999.01,-2067.32 -1967.15,-2067.32 ; -1999.01,-2046.08 -1991.04,-2046.08 ; -1999.01,-1995.64 -1903.43,-1995.64 ; -1999.01,-1992.98 -1903.43,-1992.98 ; -1999.01,-1982.36 -1906.08,-1982.36 ; -1999.01,-1979.71 -1903.43,-1979.71 ; -1999.01,-1977.05 -1903.43,-1977.05 ; -1999.01,-1910.68 -1991.04,-1910.68 ; -1999.01,-1831.03 -1943.25,-1831.03 ; -1999.01,-1719.52 -1919.36,-1719.52 ; -1999.01,-1544.28 -1898.12,-1544.28 ; -1999.01,-1507.11 -1985.73,-1507.11 ; -1999.01,-1419.5 -1940.6,-1419.5 ; -1999.01,-1403.57 -1940.6,-1403.57 ; -1999.01,-1382.33 -1993.7,-1382.33 ; -1999.01,-1215.06 -1842.36,-1215.06 ; -1996.35,-2210.7 -1991.04,-2210.7 ; -1996.35,-2208.04 -1988.39,-2208.04 ; -1996.35,-2205.39 -1988.39,-2205.39 ; -1996.35,-2202.73 -1985.73,-2202.73 ; -1996.35,-2200.08 -1985.73,-2200.08 ; -1996.35,-2197.42 -1983.08,-2197.42 ; -1996.35,-2194.77 -1980.42,-2194.77 ; -1996.35,-2192.11 -1977.77,-2192.11 ; -1996.35,-2189.46 -1914.05,-2189.46 ; -1996.35,-2043.43 -1948.56,-2043.43 ; -1996.35,-2040.77 -1831.74,-2040.77 ; -1996.35,-2038.12 -1829.09,-2038.12 ; -1996.35,-2000.95 -1900.77,-2000.95 ; -1996.35,-1998.29 -1903.43,-1998.29 ; -1996.35,-1974.4 -1903.43,-1974.4 ; -1996.35,-1971.74 -1961.84,-1971.74 ; -1996.35,-1908.02 -1988.39,-1908.02 ; -1996.35,-1833.68 -1940.6,-1833.68 ; -1996.35,-1608 -1993.7,-1608 ; -1996.35,-1541.63 -1906.08,-1541.63 ; -1996.35,-1400.91 -1940.6,-1400.91 ; -1996.35,-1379.67 -1993.7,-1379.67 ; -1996.35,-1217.72 -1826.43,-1217.72 ; -1993.7,-2216.01 -1991.04,-2216.01 ; -1993.7,-2213.35 -1991.04,-2213.35 ; -1993.7,-2186.8 -1908.74,-2186.8 ; -1993.7,-2184.15 -1903.43,-2184.15 ; -1993.7,-2181.49 -1956.53,-2181.49 ; -1993.7,-2035.46 -1826.43,-2035.46 ; -1993.7,-2032.81 -1823.78,-2032.81 ; -1993.7,-2030.15 -1821.12,-2030.15 ; -1993.7,-2027.5 -1821.12,-2027.5 ; -1993.7,-2008.91 -1895.46,-2008.91 ; -1993.7,-2006.26 -1898.12,-2006.26 ; -1993.7,-2003.6 -1898.12,-2003.6 ; -1993.7,-1969.09 -1967.15,-1969.09 ; -1993.7,-1966.43 -1969.8,-1966.43 ; -1993.7,-1963.78 -1972.46,-1963.78 ; -1993.7,-1905.37 -1985.73,-1905.37 ; -1993.7,-1902.71 -1983.08,-1902.71 ; -1993.7,-1836.34 -1937.94,-1836.34 ; -1993.7,-1722.17 -1924.67,-1722.17 ; -1993.7,-1605.35 -1988.39,-1605.35 ; -1993.7,-1538.97 -1908.74,-1538.97 ; -1993.7,-1504.46 -1980.42,-1504.46 ; -1993.7,-1398.26 -1937.94,-1398.26 ; -1993.7,-1276.13 -1927.32,-1276.13 ; -1993.7,-1220.37 -1826.43,-1220.37 ; -1991.04,-2218.66 -1988.39,-2218.66 ; -1991.04,-2024.84 -1818.47,-2024.84 ; -1991.04,-2022.19 -1868.91,-2022.19 ; -1991.04,-2019.53 -1882.19,-2019.53 ; -1991.04,-2016.88 -1884.84,-2016.88 ; -1991.04,-2014.22 -1890.15,-2014.22 ; -1991.04,-2011.57 -1892.81,-2011.57 ; -1991.04,-1961.12 -1975.11,-1961.12 ; -1991.04,-1958.47 -1975.11,-1958.47 ; -1991.04,-1955.81 -1975.11,-1955.81 ; -1991.04,-1900.06 -1980.42,-1900.06 ; -1991.04,-1841.65 -1932.63,-1841.65 ; -1991.04,-1838.99 -1935.29,-1838.99 ; -1991.04,-1602.69 -1983.08,-1602.69 ; -1991.04,-1501.8 -1975.11,-1501.8 ; -1991.04,-1422.15 -1940.6,-1422.15 ; -1991.04,-1395.6 -1935.29,-1395.6 ; -1991.04,-1252.23 -1922.01,-1252.23 ; -1991.04,-1241.61 -1985.73,-1241.61 ; -1991.04,-1225.68 -1823.78,-1225.68 ; -1991.04,-1223.03 -1823.78,-1223.03 ; -1988.39,-1953.16 -1977.77,-1953.16 ; -1988.39,-1950.5 -1977.77,-1950.5 ; -1988.39,-1947.85 -1977.77,-1947.85 ; -1988.39,-1945.19 -1977.77,-1945.19 ; -1988.39,-1897.4 -1975.11,-1897.4 ; -1988.39,-1894.75 -1969.8,-1894.75 ; -1988.39,-1844.3 -1929.98,-1844.3 ; -1988.39,-1724.83 -1929.98,-1724.83 ; -1988.39,-1600.04 -1975.11,-1600.04 ; -1988.39,-1597.38 -1906.08,-1597.38 ; -1988.39,-1536.32 -1914.05,-1536.32 ; -1988.39,-1499.15 -1967.15,-1499.15 ; -1988.39,-1424.81 -1937.94,-1424.81 ; -1988.39,-1392.95 -1932.63,-1392.95 ; -1988.39,-1390.29 -1929.98,-1390.29 ; -1988.39,-1238.96 -1975.11,-1238.96 ; -1988.39,-1236.3 -1826.43,-1236.3 ; -1988.39,-1233.65 -1826.43,-1233.65 ; -1988.39,-1230.99 -1823.78,-1230.99 ; -1988.39,-1228.34 -1823.78,-1228.34 ; -1985.73,-1942.54 -1975.11,-1942.54 ; -1985.73,-1939.88 -1975.11,-1939.88 ; -1985.73,-1937.23 -1972.46,-1937.23 ; -1985.73,-1892.09 -1961.84,-1892.09 ; -1985.73,-1889.44 -1884.84,-1889.44 ; -1985.73,-1852.27 -1919.36,-1852.27 ; -1985.73,-1849.61 -1924.67,-1849.61 ; -1985.73,-1846.96 -1927.32,-1846.96 ; -1985.73,-1533.66 -1916.7,-1533.66 ; -1985.73,-1496.49 -1959.18,-1496.49 ; -1985.73,-1493.84 -1948.56,-1493.84 ; -1985.73,-1387.64 -1914.05,-1387.64 ; -1983.08,-2064.67 -1961.84,-2064.67 ; -1983.08,-1934.57 -1972.46,-1934.57 ; -1983.08,-1931.92 -1969.8,-1931.92 ; -1983.08,-1886.78 -1887.5,-1886.78 ; -1983.08,-1884.13 -1890.15,-1884.13 ; -1983.08,-1881.47 -1892.81,-1881.47 ; -1983.08,-1878.82 -1895.46,-1878.82 ; -1983.08,-1876.16 -1898.12,-1876.16 ; -1983.08,-1862.89 -1908.74,-1862.89 ; -1983.08,-1860.23 -1911.39,-1860.23 ; -1983.08,-1857.58 -1914.05,-1857.58 ; -1983.08,-1854.92 -1916.7,-1854.92 ; -1983.08,-1594.73 -1911.39,-1594.73 ; -1983.08,-1491.18 -1932.63,-1491.18 ; -1983.08,-1427.46 -1935.29,-1427.46 ; -1983.08,-1273.47 -1929.98,-1273.47 ; -1980.42,-1929.26 -1964.49,-1929.26 ; -1980.42,-1926.61 -1956.53,-1926.61 ; -1980.42,-1873.51 -1900.77,-1873.51 ; -1980.42,-1870.85 -1903.43,-1870.85 ; -1980.42,-1868.2 -1903.43,-1868.2 ; -1980.42,-1865.54 -1906.08,-1865.54 ; -1980.42,-1727.48 -1937.94,-1727.48 ; -1980.42,-1592.07 -1914.05,-1592.07 ; -1980.42,-1531.01 -1919.36,-1531.01 ; -1980.42,-1488.53 -1932.63,-1488.53 ; -1980.42,-1485.87 -1929.98,-1485.87 ; -1980.42,-1430.12 -1932.63,-1430.12 ; -1980.42,-1249.58 -1929.98,-1249.58 ; -1977.77,-2115.11 -1964.49,-2115.11 ; -1977.77,-2112.46 -1964.49,-2112.46 ; -1977.77,-2109.8 -1967.15,-2109.8 ; -1977.77,-2107.15 -1967.15,-2107.15 ; -1977.77,-2104.49 -1967.15,-2104.49 ; -1977.77,-2101.84 -1967.15,-2101.84 ; -1977.77,-2099.18 -1967.15,-2099.18 ; -1977.77,-2096.53 -1964.49,-2096.53 ; -1977.77,-2093.87 -1964.49,-2093.87 ; -1977.77,-1923.95 -1927.32,-1923.95 ; -1977.77,-1483.22 -1929.98,-1483.22 ; -1977.77,-1435.43 -1895.46,-1435.43 ; -1977.77,-1432.77 -1927.32,-1432.77 ; -1977.77,-1315.95 -1969.8,-1315.95 ; -1977.77,-1313.3 -1972.46,-1313.3 ; -1977.77,-1310.64 -1975.11,-1310.64 ; -1975.11,-2120.42 -1961.84,-2120.42 ; -1975.11,-2117.77 -1961.84,-2117.77 ; -1975.11,-2091.22 -1961.84,-2091.22 ; -1975.11,-2088.56 -1959.18,-2088.56 ; -1975.11,-1921.3 -1927.32,-1921.3 ; -1975.11,-1918.64 -1929.98,-1918.64 ; -1975.11,-1589.42 -1919.36,-1589.42 ; -1975.11,-1528.35 -1922.01,-1528.35 ; -1975.11,-1480.56 -1929.98,-1480.56 ; -1975.11,-1477.91 -1927.32,-1477.91 ; -1975.11,-1438.08 -1895.46,-1438.08 ; -1975.11,-1321.26 -1964.49,-1321.26 ; -1975.11,-1318.61 -1967.15,-1318.61 ; -1972.46,-2123.08 -1959.18,-2123.08 ; -1972.46,-2085.91 -1953.87,-2085.91 ; -1972.46,-2083.25 -1948.56,-2083.25 ; -1972.46,-1915.99 -1932.63,-1915.99 ; -1972.46,-1475.25 -1927.32,-1475.25 ; -1972.46,-1472.6 -1924.67,-1472.6 ; -1972.46,-1469.94 -1922.01,-1469.94 ; -1972.46,-1446.05 -1900.77,-1446.05 ; -1972.46,-1443.39 -1898.12,-1443.39 ; -1972.46,-1440.74 -1898.12,-1440.74 ; -1972.46,-1326.57 -1951.22,-1326.57 ; -1972.46,-1323.92 -1959.18,-1323.92 ; -1972.46,-1270.82 -1935.29,-1270.82 ; -1969.8,-2231.94 -1892.81,-2231.94 ; -1969.8,-2192.11 -1919.36,-2192.11 ; -1969.8,-2125.73 -1953.87,-2125.73 ; -1969.8,-2080.6 -1898.12,-2080.6 ; -1969.8,-1913.33 -1935.29,-1913.33 ; -1969.8,-1586.76 -1924.67,-1586.76 ; -1969.8,-1525.7 -1924.67,-1525.7 ; -1969.8,-1467.29 -1922.01,-1467.29 ; -1969.8,-1464.63 -1919.36,-1464.63 ; -1969.8,-1461.98 -1916.7,-1461.98 ; -1969.8,-1459.32 -1914.05,-1459.32 ; -1969.8,-1456.67 -1911.39,-1456.67 ; -1969.8,-1454.01 -1908.74,-1454.01 ; -1969.8,-1451.36 -1906.08,-1451.36 ; -1969.8,-1448.7 -1903.43,-1448.7 ; -1969.8,-1329.23 -1908.74,-1329.23 ; -1967.15,-1910.68 -1937.94,-1910.68 ; -1967.15,-1331.88 -1911.39,-1331.88 ; -1967.15,-1246.92 -1940.6,-1246.92 ; -1964.49,-2128.39 -1932.63,-2128.39 ; -1964.49,-2077.94 -1903.43,-2077.94 ; -1964.49,-1730.14 -1953.87,-1730.14 ; -1964.49,-1584.11 -1932.63,-1584.11 ; -1964.49,-1523.04 -1924.67,-1523.04 ; -1964.49,-1334.54 -1916.7,-1334.54 ; -1961.84,-2131.04 -1937.94,-2131.04 ; -1961.84,-2075.29 -1906.08,-2075.29 ; -1961.84,-1908.02 -1943.25,-1908.02 ; -1959.18,-2194.77 -1922.01,-2194.77 ; -1959.18,-2072.63 -1911.39,-2072.63 ; -1959.18,-1600.04 -1903.43,-1600.04 ; -1959.18,-1337.19 -1919.36,-1337.19 ; -1956.53,-2112.46 -1900.77,-2112.46 ; -1956.53,-2109.8 -1903.43,-2109.8 ; -1956.53,-2107.15 -1903.43,-2107.15 ; -1956.53,-2104.49 -1906.08,-2104.49 ; -1956.53,-2101.84 -1908.74,-2101.84 ; -1956.53,-2099.18 -1911.39,-2099.18 ; -1956.53,-1520.39 -1927.32,-1520.39 ; -1953.87,-2197.42 -1922.01,-2197.42 ; -1953.87,-2133.7 -1945.91,-2133.7 ; -1953.87,-2115.11 -1929.98,-2115.11 ; -1953.87,-2096.53 -1914.05,-2096.53 ; -1953.87,-1268.16 -1948.56,-1268.16 ; -1951.22,-2093.87 -1919.36,-2093.87 ; -1951.22,-2069.98 -1922.01,-2069.98 ; -1951.22,-1926.61 -1924.67,-1926.61 ; -1951.22,-1695.62 -1895.46,-1695.62 ; -1951.22,-1692.97 -1892.81,-1692.97 ; -1951.22,-1690.31 -1892.81,-1690.31 ; -1951.22,-1339.85 -1927.32,-1339.85 ; -1948.56,-2200.08 -1914.05,-2200.08 ; -1948.56,-2117.77 -1935.29,-2117.77 ; -1948.56,-1602.69 -1900.77,-1602.69 ; -1945.91,-2043.43 -1837.05,-2043.43 ; -1945.91,-1971.74 -1903.43,-1971.74 ; -1945.91,-1892.09 -1884.84,-1892.09 ; -1945.91,-1783.24 -1922.01,-1783.24 ; -1945.91,-1780.58 -1924.67,-1780.58 ; -1945.91,-1777.93 -1932.63,-1777.93 ; -1945.91,-1687.66 -1890.15,-1687.66 ; -1945.91,-1517.73 -1927.32,-1517.73 ; -1943.25,-2202.73 -1906.08,-2202.73 ; -1943.25,-2091.22 -1927.32,-2091.22 ; -1943.25,-1929.26 -1924.67,-1929.26 ; -1943.25,-1785.89 -1916.7,-1785.89 ; -1943.25,-1762 -1884.84,-1762 ; -1943.25,-1746.07 -1465.35,-1746.07 ; -1943.25,-1605.35 -1898.12,-1605.35 ; -1940.6,-1788.55 -1911.39,-1788.55 ; -1940.6,-1685 -1890.15,-1685 ; -1940.6,-1260.2 -1911.39,-1260.2 ; -1937.94,-2205.39 -1898.12,-2205.39 ; -1937.94,-1969.09 -1900.77,-1969.09 ; -1937.94,-1931.92 -1924.67,-1931.92 ; -1937.94,-1791.2 -1908.74,-1791.2 ; -1937.94,-1682.35 -1887.5,-1682.35 ; -1937.94,-1608 -1898.12,-1608 ; -1935.29,-1937.23 -1924.67,-1937.23 ; -1935.29,-1934.57 -1924.67,-1934.57 ; -1935.29,-1894.75 -1882.19,-1894.75 ; -1935.29,-1796.51 -1900.77,-1796.51 ; -1935.29,-1793.86 -1903.43,-1793.86 ; -1935.29,-1679.69 -1887.5,-1679.69 ; -1935.29,-1610.66 -1895.46,-1610.66 ; -1935.29,-1570.83 -1847.67,-1570.83 ; -1932.63,-1966.43 -1900.77,-1966.43 ; -1932.63,-1942.54 -1927.32,-1942.54 ; -1932.63,-1939.88 -1924.67,-1939.88 ; -1932.63,-1897.4 -1879.53,-1897.4 ; -1932.63,-1799.17 -1895.46,-1799.17 ; -1932.63,-1764.65 -1884.84,-1764.65 ; -1932.63,-1743.41 -1457.38,-1743.41 ; -1932.63,-1677.04 -1884.84,-1677.04 ; -1932.63,-1613.31 -1892.81,-1613.31 ; -1932.63,-1238.96 -1826.43,-1238.96 ; -1929.98,-2208.04 -1892.81,-2208.04 ; -1929.98,-2181.49 -1900.77,-2181.49 ; -1929.98,-1947.85 -1927.32,-1947.85 ; -1929.98,-1945.19 -1927.32,-1945.19 ; -1929.98,-1801.82 -1892.81,-1801.82 ; -1929.98,-1674.38 -1884.84,-1674.38 ; -1929.98,-1615.97 -1892.81,-1615.97 ; -1929.98,-1326.57 -1906.08,-1326.57 ; -1929.98,-1262.85 -1908.74,-1262.85 ; -1927.32,-1963.78 -1898.12,-1963.78 ; -1927.32,-1900.06 -1879.53,-1900.06 ; -1927.32,-1767.31 -1882.19,-1767.31 ; -1927.32,-1671.73 -1884.84,-1671.73 ; -1927.32,-1621.28 -1890.15,-1621.28 ; -1927.32,-1618.62 -1890.15,-1618.62 ; -1924.67,-1961.12 -1898.12,-1961.12 ; -1924.67,-1902.71 -1879.53,-1902.71 ; -1924.67,-1804.48 -1887.5,-1804.48 ; -1924.67,-1740.76 -1051.16,-1740.76 ; -1924.67,-1669.07 -1884.84,-1669.07 ; -1924.67,-1666.42 -1882.19,-1666.42 ; -1924.67,-1626.59 -1887.5,-1626.59 ; -1924.67,-1623.93 -1887.5,-1623.93 ; -1924.67,-1573.49 -1845.02,-1573.49 ; -1924.67,-1323.92 -1903.43,-1323.92 ; -1924.67,-1265.51 -1906.08,-1265.51 ; -1924.67,-1241.61 -1829.09,-1241.61 ; -1922.01,-2210.7 -1884.84,-2210.7 ; -1922.01,-2178.84 -1898.12,-2178.84 ; -1922.01,-2083.25 -1895.46,-2083.25 ; -1922.01,-1958.47 -1895.46,-1958.47 ; -1922.01,-1905.37 -1879.53,-1905.37 ; -1922.01,-1807.13 -1884.84,-1807.13 ; -1922.01,-1769.96 -1879.53,-1769.96 ; -1922.01,-1663.76 -1882.19,-1663.76 ; -1922.01,-1661.11 -1882.19,-1661.11 ; -1922.01,-1658.45 -1882.19,-1658.45 ; -1922.01,-1634.55 -1884.84,-1634.55 ; -1922.01,-1631.9 -1884.84,-1631.9 ; -1922.01,-1629.24 -1887.5,-1629.24 ; -1922.01,-1268.16 -1903.43,-1268.16 ; -1919.36,-2125.73 -1898.12,-2125.73 ; -1919.36,-2123.08 -1898.12,-2123.08 ; -1919.36,-2120.42 -1898.12,-2120.42 ; -1919.36,-2117.77 -1898.12,-2117.77 ; -1919.36,-2115.11 -1900.77,-2115.11 ; -1919.36,-1955.81 -1892.81,-1955.81 ; -1919.36,-1953.16 -1887.5,-1953.16 ; -1919.36,-1910.68 -1882.19,-1910.68 ; -1919.36,-1908.02 -1879.53,-1908.02 ; -1919.36,-1809.79 -1882.19,-1809.79 ; -1919.36,-1738.1 -1051.16,-1738.1 ; -1919.36,-1655.8 -1882.19,-1655.8 ; -1919.36,-1653.14 -1882.19,-1653.14 ; -1919.36,-1650.49 -1882.19,-1650.49 ; -1919.36,-1647.83 -1882.19,-1647.83 ; -1919.36,-1645.18 -1882.19,-1645.18 ; -1919.36,-1642.52 -1882.19,-1642.52 ; -1919.36,-1639.86 -1882.19,-1639.86 ; -1919.36,-1637.21 -1884.84,-1637.21 ; -1919.36,-1321.26 -1903.43,-1321.26 ; -1919.36,-1270.82 -1900.77,-1270.82 ; -1919.36,-1244.27 -1829.09,-1244.27 ; -1916.7,-2213.35 -1876.88,-2213.35 ; -1916.7,-2176.18 -1895.46,-2176.18 ; -1916.7,-2085.91 -1892.81,-2085.91 ; -1916.7,-1950.5 -1884.84,-1950.5 ; -1916.7,-1947.85 -1879.53,-1947.85 ; -1916.7,-1915.99 -1898.12,-1915.99 ; -1916.7,-1913.33 -1887.5,-1913.33 ; -1916.7,-1812.44 -1876.88,-1812.44 ; -1916.7,-1772.62 -1879.53,-1772.62 ; -1916.7,-1576.14 -1839.71,-1576.14 ; -1916.7,-1318.61 -1900.77,-1318.61 ; -1916.7,-1273.47 -1900.77,-1273.47 ; -1914.05,-2046.08 -1842.36,-2046.08 ; -1914.05,-1945.19 -1754.75,-1945.19 ; -1914.05,-1942.54 -1746.78,-1942.54 ; -1914.05,-1939.88 -1104.27,-1939.88 ; -1914.05,-1923.95 -1890.15,-1923.95 ; -1914.05,-1921.3 -1898.12,-1921.3 ; -1914.05,-1918.64 -1900.77,-1918.64 ; -1914.05,-1815.1 -1874.22,-1815.1 ; -1914.05,-1735.45 -1051.16,-1735.45 ; -1914.05,-1432.77 -1892.81,-1432.77 ; -1914.05,-1315.95 -1898.12,-1315.95 ; -1914.05,-1313.3 -1898.12,-1313.3 ; -1914.05,-1276.13 -1898.12,-1276.13 ; -1914.05,-1246.92 -1831.74,-1246.92 ; -1911.39,-2173.53 -1892.81,-2173.53 ; -1911.39,-2088.56 -1890.15,-2088.56 ; -1911.39,-1937.23 -1101.61,-1937.23 ; -1911.39,-1934.57 -1101.61,-1934.57 ; -1911.39,-1931.92 -1098.96,-1931.92 ; -1911.39,-1929.26 -1096.3,-1929.26 ; -1911.39,-1926.61 -1093.65,-1926.61 ; -1911.39,-1817.75 -1871.57,-1817.75 ; -1911.39,-1775.27 -1876.88,-1775.27 ; -1911.39,-1732.79 -1048.51,-1732.79 ; -1911.39,-1578.8 -1837.05,-1578.8 ; -1911.39,-1310.64 -1898.12,-1310.64 ; -1911.39,-1281.44 -1895.46,-1281.44 ; -1911.39,-1278.78 -1898.12,-1278.78 ; -1908.74,-2216.01 -1868.91,-2216.01 ; -1908.74,-2170.87 -1890.15,-2170.87 ; -1908.74,-1820.41 -1868.91,-1820.41 ; -1908.74,-1777.93 -1874.22,-1777.93 ; -1908.74,-1430.12 -1892.81,-1430.12 ; -1908.74,-1307.99 -1895.46,-1307.99 ; -1908.74,-1305.33 -1895.46,-1305.33 ; -1908.74,-1302.68 -1895.46,-1302.68 ; -1908.74,-1300.02 -1890.15,-1300.02 ; -1908.74,-1297.37 -1884.84,-1297.37 ; -1908.74,-1294.71 -1879.53,-1294.71 ; -1908.74,-1292.06 -1874.22,-1292.06 ; -1908.74,-1289.4 -1871.57,-1289.4 ; -1908.74,-1286.75 -1871.57,-1286.75 ; -1908.74,-1284.09 -1895.46,-1284.09 ; -1908.74,-1249.58 -1831.74,-1249.58 ; -1906.08,-2168.22 -1887.5,-2168.22 ; -1906.08,-2091.22 -1887.5,-2091.22 ; -1906.08,-2064.67 -1903.43,-2064.67 ; -1906.08,-1823.06 -1863.6,-1823.06 ; -1906.08,-1730.14 -1045.85,-1730.14 ; -1906.08,-1581.45 -1829.09,-1581.45 ; -1906.08,-1387.64 -1834.4,-1387.64 ; -1906.08,-1252.23 -1834.4,-1252.23 ; -1903.43,-2165.56 -1884.84,-2165.56 ; -1903.43,-2093.87 -1860.95,-2093.87 ; -1903.43,-2067.32 -1775.99,-2067.32 ; -1903.43,-1825.72 -1860.95,-1825.72 ; -1903.43,-1780.58 -1874.22,-1780.58 ; -1903.43,-1727.48 -1045.85,-1727.48 ; -1903.43,-1584.11 -1821.12,-1584.11 ; -1903.43,-1491.18 -1860.95,-1491.18 ; -1903.43,-1488.53 -1858.29,-1488.53 ; -1903.43,-1485.87 -1858.29,-1485.87 ; -1903.43,-1427.46 -1892.81,-1427.46 ; -1903.43,-1254.89 -1882.19,-1254.89 ; -1900.77,-2218.66 -1860.95,-2218.66 ; -1900.77,-2162.91 -1884.84,-2162.91 ; -1900.77,-2096.53 -1855.64,-2096.53 ; -1900.77,-1828.37 -1858.29,-1828.37 ; -1900.77,-1783.24 -1871.57,-1783.24 ; -1900.77,-1483.22 -1855.64,-1483.22 ; -1900.77,-1424.81 -1892.81,-1424.81 ; -1900.77,-1422.15 -1892.81,-1422.15 ; -1900.77,-1257.54 -1884.84,-1257.54 ; -1898.12,-2160.25 -1882.19,-2160.25 ; -1898.12,-2099.18 -1852.98,-2099.18 ; -1898.12,-2069.98 -1775.99,-2069.98 ; -1898.12,-1831.03 -1855.64,-1831.03 ; -1898.12,-1724.83 -1043.2,-1724.83 ; -1898.12,-1586.76 -1810.5,-1586.76